# Altium PCB PCB1.PcbDoc
Units mm, origin at the board's own origin, x right, y up, seen from the top; angles counter-clockwise.
Board outline 75 x 30 mm, 3 copper layers (Top Layer, Mid-Layer 2, Bottom Layer); 24 components, 15 nets, 80 pads, 8 vias.
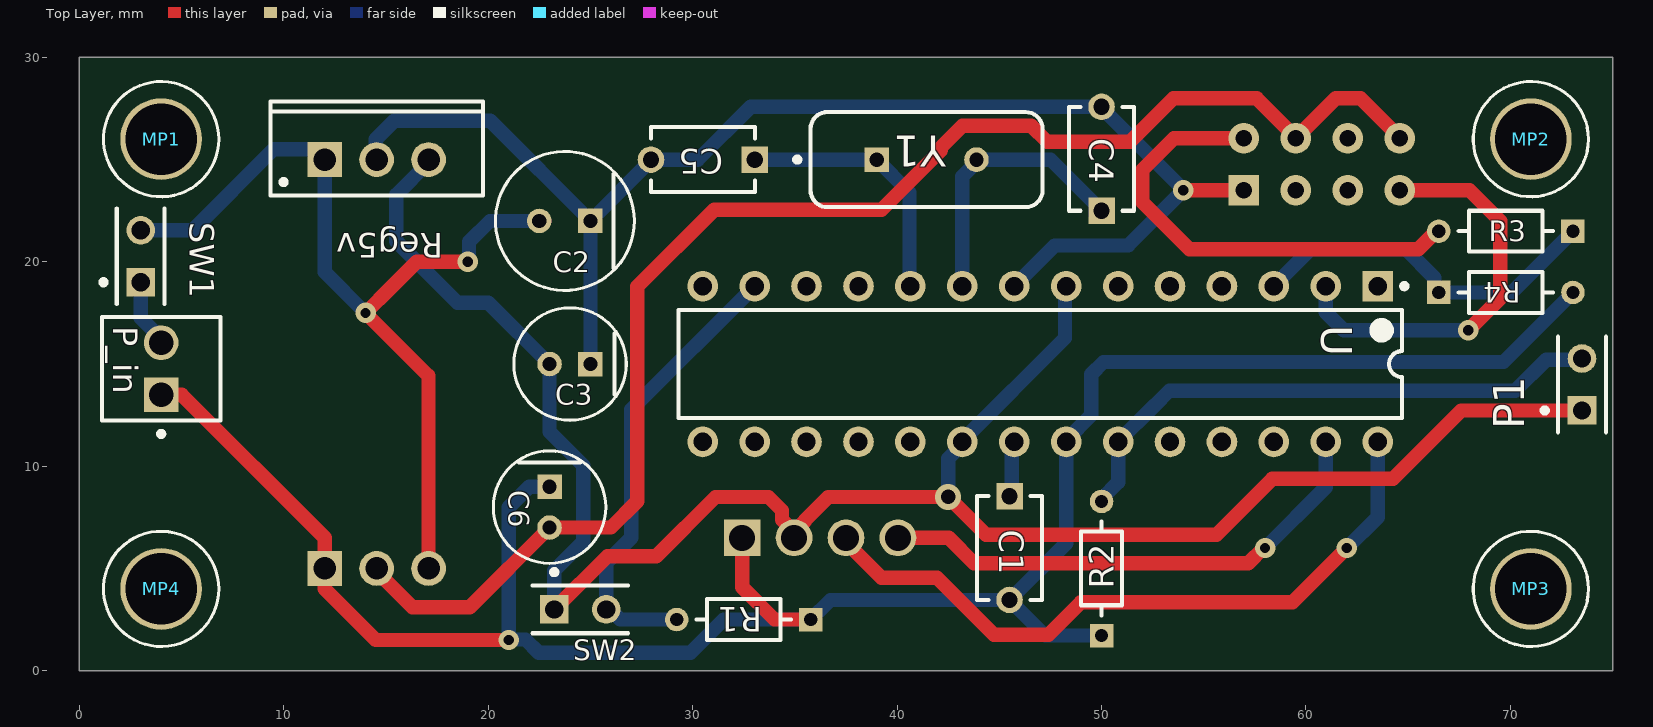
[diagram p0: Top Layer view]
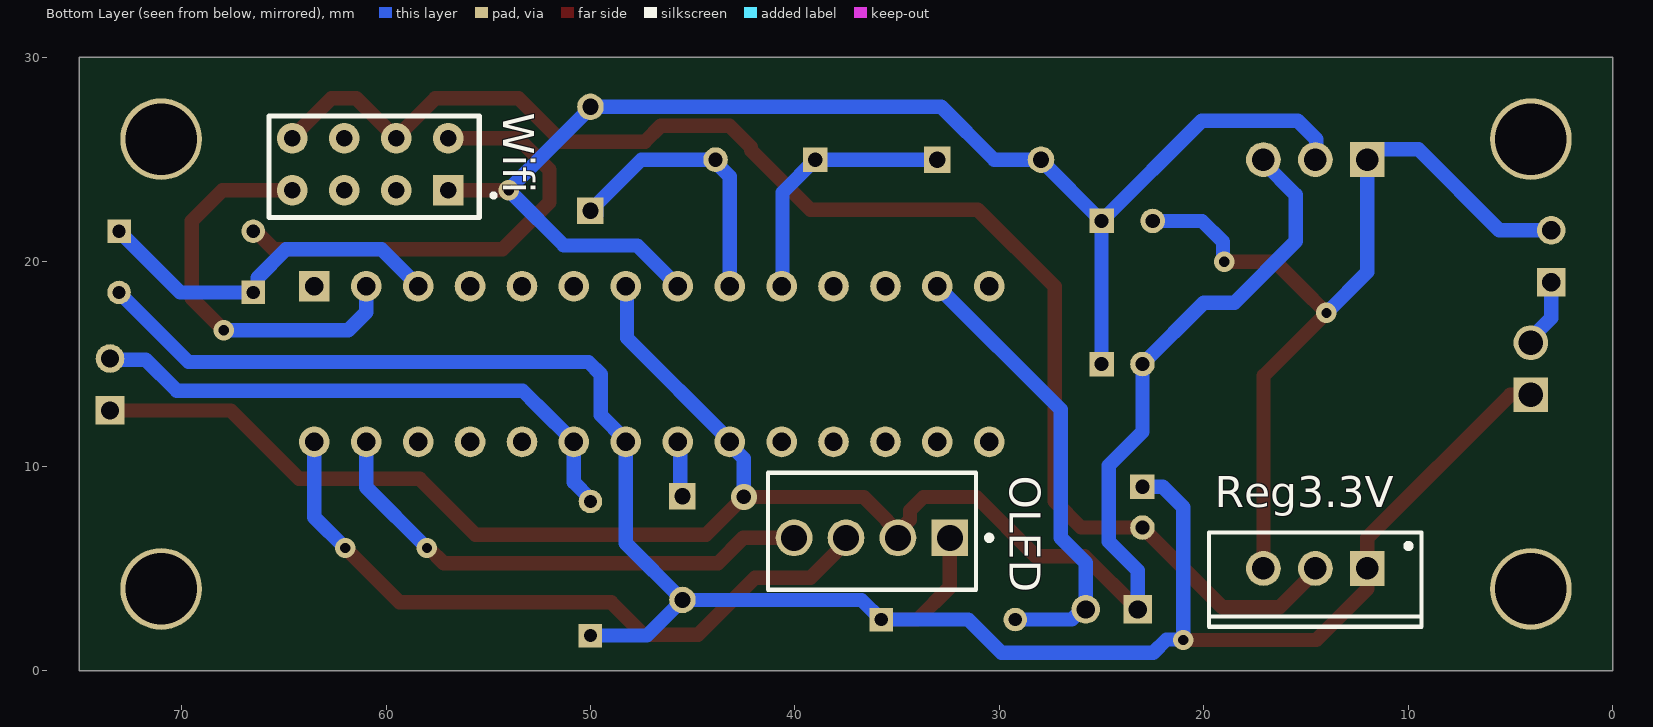
[diagram p1: Bottom Layer view, seen from below]
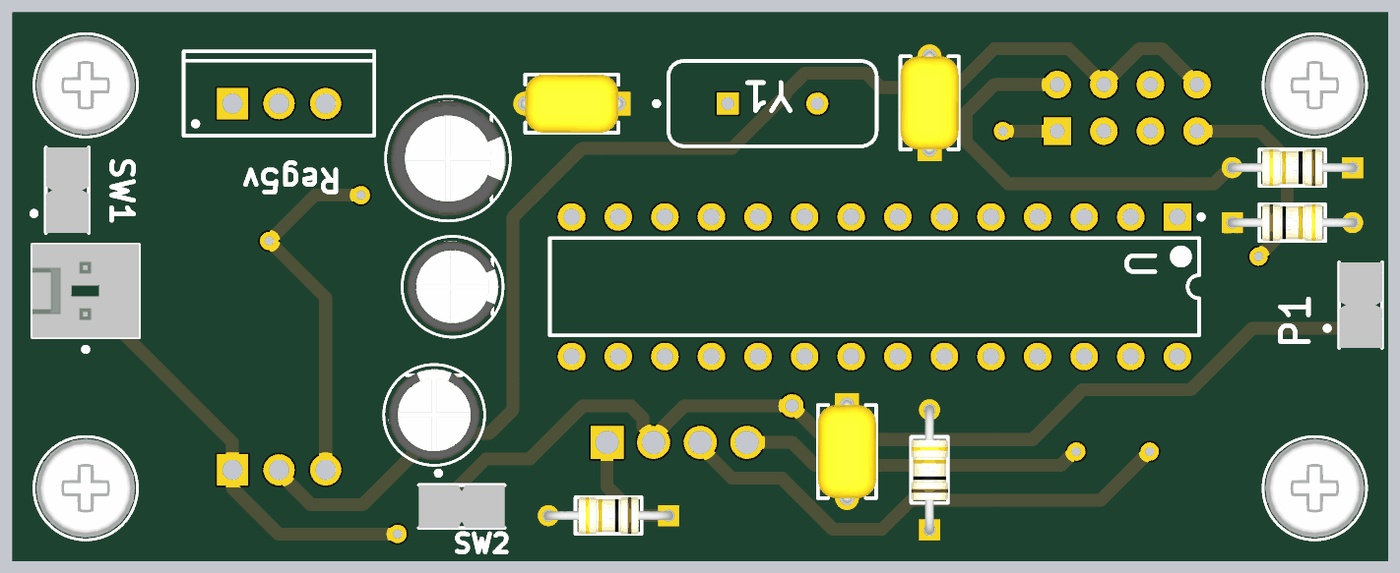
[diagram p2: 3D render of the assembled board from above, using the file's embedded part models]

## Layer stack, top to bottom
Top Solder: solder mask 0.0102, Solder Resist, Dk 3.5
Top Layer: signal copper 0.0356
Dielectric 1: dielectric 0.32, FR-4, Dk 4.8
Mid-Layer 2: signal copper 0.0356
Dielectric2: dielectric 0.32, FR-4, Dk 4.8
Bottom Layer: signal copper 0.0356
Bottom Solder: solder mask 0.0102, Solder Resist, Dk 3.5

## Board outline
75,30 75,0 0,0 0,30

## Design rules (kind name [scope] priority, off if disabled: settings)
BoardOutlineClearance [All] p1: gap=0.2 ignorepadtopadclearanceinfootprint=FALSE except(0.4: Arc-SplitBarrior Arc-SplitContinuation Track-SplitBarrior Track-SplitContinuation SMDPad-SplitBarrior SMDPad-SplitContinuation THPad-SplitBarrior THPad-SplitContinuation Via-SplitBarrior Via-SplitContinuation Fill-SplitBarrior Fill-SplitContinuation Poly-SplitBarrior Poly-SplitContinuation Region-SplitBarrior Region-SplitContinuation Text-SplitBarrior Text-SplitContinuation)
Clearance [All] p1: gap=0.7 ignorepadtopadclearanceinfootprint=FALSE
HoleSize [All] p1: absolutevalues=TRUE maxlimit=6.3 minlimit=0.2 maxpercent=80.000 minpercent=20.000
MinimumAnnularRing [All] p1: minimumring=0.076
MinimumSolderMaskSliver [All] p1: minsoldermaskwidth=0.1
PolygonConnect PolygonConnect_1 [All] p1: thpad.connectstyle=Relief thpad.reliefconductorwidth=0.508 thpad.reliefentries=4 thpad.polygonreliefangle="90 Angle" thpad.airgapwidth=0.254 smdpad.connectstyle=Relief smdpad.reliefconductorwidth=0.508 smdpad.reliefentries=4 smdpad.polygonreliefangle="90 Angle" smdpad.airgapwidth=0.254 via.connectstyle=Direct via.reliefconductorwidth=0.508 via.reliefentries=4 via.polygonreliefangle="90 Angle" via.airgapwidth=0.254
RoutingCorners [All] p1: cornerstyle=Round minsetback=2.54 maxsetback=2.54
RoutingVias [All] p1: holewidth=0.5 width=1 viastyle="Through Hole" minholewidth=0.2 minwidth=0.45 maxholewidth=1 maxwidth=2
SilkToSilkClearance [All] p1: silktosilkclearance=0.1
SilkToSolderMaskClearance [IsPad] p1: minsilkscreentomaskgap=0.1 clearancetoexposedcopper=TRUE
SolderMaskExpansion [All] p1: expansion=0.102 istentingtop=FALSE
Width [All] p1: maxlimit=2.54 minlimit=0.089 preferedwidth=0.7 toplayer_minwidth=0.6 midlayer2_prefwidth=0.381 bottomlayer_minwidth=0.6 minimp=50.000000 maximp=50.000000 favimp=50.000000
25 further rules are at their usual default settings.

## Components (designator, comment, footprint, x,y, rotation, side; value= is the part's Value field where it differs from the comment)
C1 "100nf" FP-C322C104K5R5TA-MFG 45.5,6 r270 top
C2 "4.7uF" FP-RAD-TH-D_6_3_0_5-L_11-MFG 23.75,22 r180 top
C3 "10uF" FP-RAD-TH-D_5_0_5-L_11_1-MFG 24,15 r180 top
C4 "22pF" FP-C322C104K5R5TA-MFG 50,25.04 r90 top
C5 "22pF" FP-C322C104K5R5TA-MFG 30.5,25 r180 top
C6 "10uF" FP-RAD-TH-D_5_0_5-L_11_1-MFG 23,8 r270 top
MP1 "9901" FP-9901-MFG 4,26 r0 top
MP2 "9901" FP-9901-MFG 71,26 r0 top
MP3 "9901" FP-9901-MFG 71,4 r0 top
MP4 "9901" FP-9901-MFG 4,4 r0 top
OLED "6" TECO-640456-4 36.23,6.5 r180 bottom
P1 "5-146280-2" TECO-5-146280-2_V 73.5,14 r90 top
P_in "9V" MOLX-22-27-2021_V 4,14.77 r90 top
R1 "10k" FP-CF18-MFG 32.5,2.5 r180 top value=10kΩ
R2 "10k" FP-CF18-MFG 50,5 r90 top value=10kΩ
R3 "1k" FP-CF18-MFG 69.78,21.5 r180 top value=10kΩ
R4 "2.2k" FP-CF18-MFG 69.78,18.5 r0 top value=10kΩ
Reg3.3V "LD1117V33" TO220 14.54,5 r0 bottom
Reg5v "5V" TO220 14.54,25 r0 top
SW1 "5-146280-2" TECO-5-146280-2_V 3,20.27 r90 top
SW2 "5-146280-2" TECO-5-146280-2_V 24.5,3 r0 top
U "ATmega328P-PU" 28P3 47,15 r270 top
Wifi "ESP8266-01/ESP-01" XCVR_ESP8266-01/ESP-01 60.77,15.19 r0 bottom
Y1 "16MHz" FOX-FOXSLF160-20 41.44,25 r0 top

## Footprints (in the part's own frame and the unit in brackets; to place one, negate y for a bottom-side part, rotate by r counter-clockwise, add the part's x,y. Pads: shape width x height; smd on the part's side, far side on the other; paste and mask are expansions set on the pad)
28P3 [mm] "28-Pin Plastic Dual In-Line Package (PDIP)"
  rect 1.5x1.5 hole 0.9: 1(-3.81,16.51)
  round 1.5 hole 0.9: 2(-3.81,13.97) 3(-3.81,11.43) 4(-3.81,8.89) 5(-3.81,6.35) 6(-3.81,3.81) 7(-3.81,1.27) 8(-3.81,-1.27) 9(-3.81,-3.81) 10(-3.81,-6.35) 11(-3.81,-8.89) 12(-3.81,-11.43) 13(-3.81,-13.97) 14(-3.81,-16.51) 15(3.81,-16.51) 16(3.81,-13.97) 17(3.81,-11.43) 18(3.81,-8.89) 19(3.81,-6.35) 20(3.81,-3.81) 21(3.81,-1.27) 22(3.81,1.27) 23(3.81,3.81) 24(3.81,6.35) 25(3.81,8.89) 26(3.81,11.43) 27(3.81,13.97) 28(3.81,16.51)
  silkscreen extent -3.93,-17.7 2.65,17.94, body extent -3.6,-17.65 3.6,17.65, height 4.58
FOX-FOXSLF160-20 [mm] "THD, 2-Leads, Body 11.35x4.65mm"
  rect 1.2x1.2 hole 0.7: 1(-2.44,0)
  round 1.2 hole 0.7: 2(2.44,0)
  silkscreen extent -6.45,-2.33 5.68,2.32, body extent -5.67,-2.32 5.68,2.33, height 3.6
FP-9901-MFG [mm]
  round 4 hole 3.5 unplated paste-1000 mask+0: ""(0,0)
  silkscreen extent -2.82,-2.82 2.82,2.82, body extent -2.92,-2.92 2.92,2.92, height 0.25
FP-C322C104K5R5TA-MFG [mm]
  rect 1.3x1.3 hole 0.8 paste-1000 mask+0: 1(-2.54,0)
  round 1.3 hole 0.8 paste-1000 mask+0: 2(2.54,0)
  silkscreen extent -2.54,-1.59 2.54,1.59, body extent -3.29,-1.69 3.29,1.69, height 0.25
FP-CF18-MFG [mm]
  rect 1.15x1.15 hole 0.65 paste-1000 mask+0: 1(-3.28,0)
  round 1.15 hole 0.65 paste-1000 mask+0: 2(3.28,0)
  silkscreen extent -2.31,-1 2.3,1, body extent -3.96,-1.1 3.96,1.1, height 0.25
FP-RAD-TH-D_5_0_5-L_11_1-MFG [mm]
  rect 1.2x1.2 hole 0.7 paste-1000 mask+0: 1(-1,0)
  round 1.2 hole 0.7 paste-1000 mask+0: 2(1,0)
  silkscreen extent -2.75,-2.75 2.75,2.75, body extent -2.85,-2.85 2.85,2.85, height 0.25
FP-RAD-TH-D_6_3_0_5-L_11-MFG [mm]
  rect 1.2x1.2 hole 0.7 paste-1000 mask+0: 1(-1.25,0)
  round 1.2 hole 0.7 paste-1000 mask+0: 2(1.25,0)
  silkscreen extent -3.4,-3.4 3.4,3.4, body extent -3.5,-3.5 3.5,3.5, height 0.25
MOLX-22-27-2021_V [mm] "Header, 2-Leads, Body 5.8x5.08mm"
  rect 1.7x1.7 hole 1.19: 1(-1.27,0)
  round 1.7 hole 1.19: 2(1.27,0)
  silkscreen extent -3.31,-2.9 2.54,2.9, body extent -2.54,-2.9 2.54,2.9, height 11.72
TECO-5-146280-2_V [mm] "Connector, 2-Leads, Body 4.67x2.34mm, Pitch 2.54mm"
  rect 1.4x1.4 hole 0.89: 1(-1.27,0)
  round 1.4 hole 0.89: 2(1.27,0)
  silkscreen extent -2.33,-1.17 2.33,1.94, body extent -2.34,-1.17 2.34,1.17, height 5.33
TECO-640456-4 [mm]
  rect 1.8x1.8 hole 1.27 paste+0: 1(3.81,0)
  round 1.8 hole 1.27 paste+0: 2(1.27,0) 3(-1.27,0) 4(-3.81,0)
  silkscreen extent -5.08,-2.54 5.86,3.18
TO220 [mm] "TO, Thru-Hole, Vertical, Heatsink Mounted; 3 In-Line Leads; Pitch 2.54 mm"
  rect 1.7x1.7 hole 1.1: 1(-2.54,0)
  round 1.7 hole 1.1: 2(0,0) 3(2.54,0)
  silkscreen extent -5.2,-1.75 5.2,2.85, body extent -5.25,-1.8 5.25,2.9, height 19.7
XCVR_ESP8266-01/ESP-01 [mm]
  rect 1.5x1.5 hole 0.8: 1(-3.81,-8.31)
  round 1.5 hole 0.8: 2(-1.27,-8.31) 3(1.27,-8.31) 4(3.81,-8.31) 5(-3.81,-10.85) 6(-1.27,-10.85) 7(1.27,-10.85) 8(3.81,-10.85)
  silkscreen extent -6.13,-11.94 4.95,-6.98

## Part data
C1 C4 C5: library part CMP-03020-034661-1, "CAP CER 0.1UF 50V X7R RADIAL", Capacitance=100nF, Case/Package=Radial, Dielectric=X7R, Dielectric Material=Ceramic, Max Operating Temperature=125°C, Min Operating Temperature=-55°C, Package Quantity=500, Tolerance=10%, Voltage=50V, Construction=RADIAL, Depth=3.18mm, Dissipation Factor=2.5%, Height=3.18mm, Height - Seated (Max)=0.26inch, Lead Diameter=0.51mm, Lead Free="Lead Free", Lead Length=7mm, Lead Pitch=5.08mm, Lead/Base Style="Formed Leads", Length=5.08mm, Material=Ceramic, Mount="Through Hole", Number of Pins=2, Packaging=Bulk, Radiation Hardening=No, REACH SVHC="No SVHC", RoHS Compliant=Yes, Series="Golden Max™", Termination=Radial, Voltage Rating=50V, Voltage Rating (DC)=50V, Weight=0.0625lb, Width=0.125inch
C2: library part CMP-05427-000237-1, "Aluminum Electrolytic Capacitors (Radial Lead Type) 4.7uF ±20% 160V", Case/Package=Radial, Dielectric Material=Aluminium, Max Operating Temperature=105°C, Min Operating Temperature=-25°C, Package Quantity=200, Ripple Current=43mA, Tolerance=20%, Voltage=160V, Capacitance=4.7uF, Construction=RADIAL, Diameter=6.3mm, Dissipation Factor=0.15%, Height=11.2mm, Height - Seated (Max)=0.48inch, Lead Diameter=0.5mm, Lead Free="Lead Free", Lead Pitch=2.5mm, Lead/Base Style=Straight, Length=11.2mm, Life (Hours)=2000Hour, Mount="Through Hole", Number of Pins=2, Packaging=Bulk, Radiation Hardening=No, REACH SVHC="No SVHC", Ripple Current (AC)=43mA, RoHS Compliant=Yes, Series=NHG, Termination=Radial, Voltage Rating=160V, Voltage Rating (DC)=160V, Weight=0.01lb, Width=0.25inch
C3 C6: library part CMP-05427-000869-1, "Aluminum Electrolytic Capacitors (Radial Lead Type) 10uF ±20% 100V", Case/Package=Radial, Dielectric Material=Aluminium, Leakage Current=3uA, Max Operating Temperature=85°C, Min Operating Temperature=-40°C, Package Quantity=200, Ripple Current=70mA, Tolerance=20%, Voltage=100V, Capacitance=10uF, Construction=RADIAL, Contact Plating=Tin, Diameter=5mm, Dissipation Factor=0.1%, Height=11mm, Height - Seated (Max)=0.472inch, Lead Diameter=0.5mm, Lead Free="Lead Free", Lead Pitch=2mm, Lead/Base Style=Straight, Length=11mm, Life (Hours)=2000Hour, Mount="Through Hole", Number of Pins=2, Packaging=Bulk, Polarity=Polar, Radiation Hardening=No, REACH SVHC="No SVHC", Ripple Current (AC)=70mA, RoHS Compliant=Yes, Series=M, Termination=Radial, Voltage Rating=100V, Voltage Rating (DC)=100V, Width=5mm
MP1 MP2 MP3 MP4: library part CMP-19664-000002-1, "MACHINE SCREW PAN PHILLIPS 4-40", Package Quantity=100, Head Height=0.065inch, Lead Free="Lead Free", Length=0.44inch, Material="Stainless Steel", Mount=Screw, Outside Diameter=0.212inch, Series=-, Thread Size=#4-40
OLED: library part CMP-2000-05419-1, "Male Header, Pitch 2.54 mm, 1 x 4 Position, Height 10.03 mm, Tail Length 3.56 mm, RoHS, Bulk", Color=White, Current, Rating="5 /  / A", Flammability Rating=UL94V-0, Manufacturer="TE Connectivity", Manufacturer Part Number=640456-4, Temperature, Operating="-55to+105 /  / degC", Voltage, Rating="250 /  / V", Agency Approvals=CSA,UL, Angle=Straight, Brand/Series=MTA-100Series, Color, Housing=White, Connector Type=MTA-100, Contact Centerline Spacing="0.100 /  / in.", Contact Mating Area Plating=Tin, Contact Plating=Tin, Contact Shape=Square, Contact Termination Area Plating=Tin, Datasheet URL=https://datasheet.ciiva.com/16286/eng-ds-82056-mta-0608-16286228.pdf, Datasheet Version=Dec-14, Length, Overall="0.4 /  / \"", Length, Pin="0.14 /  / \"", Length, Terminal Post="0.14 /  / in.", Manufacturer URL=http://www.te.com/, Material, Contact=CopperAlloy, Material, Housing=Polyester, Mount Angle=Vertical, Mounting Hole Size="0.04 /  / \"", Mounting Type=PCMount, Number of Contacts=4, Number of Positions=4, Number of Rows=1, Pin Spacing="0.1 /  / \"", Primary Type=InterconnectSystem, Size, Post="0.025 /  / in.", Special Features=Pinstrip, Standards=RoHSCompliant,ELVCompliant,UL94V-0, Termination=Solder, Type=PCBPlug
P1 SW1 SW2: library part CMP-2000-07492-1, "Male Header, Pitch 2.54 mm, 1 x 2 Position, Height 8.21 mm, Tail Length 3.05 mm, -65 to 105 degC, RoHS, Bulk", Case\/Package=100, Colour=Black, Current Rating=3A, Flammability Rating=UL94V-0, High Temperature Housing=Yes, Manufacturer="TE Connectivity", Max Current Rating=5A, Max Operating Temperature=105degC, Min Operating Temperature=-65degC, Package Description="Male Header, Pitch 2.54 mm, 1 x 2 Position, Height 8.21 mm, Tail Length 3.05 mm", Package Quantity=500, Approvals=CSA, Board Standoff=No(Without), Connector Type=Header, Contact Gender=Male, Contact Material=CopperAlloy, Contact Mating Length=0.23inch, Contact Plating=Matte, Contact Protection=No(Without), Contact Shape=Square, Datasheet URL=http://www.te.com/commerce/DocumentDelivery/DDEController?Action=showdoc&DocId=Customer+Drawing%7F146280%7FH1%7Fpdf%7FEnglish%7FENG_CD_146280_H1.pdf%7F5-146280-2, Datasheet Version="Rev. H1, 08/2016", Depth=2.34mm, Gasket=No(Without), High Speed Serial Data Connector=No, Housing Colour=Black, Housing material=Polymer, Keyed=No, Length=4.67mm, Manufacturer URL=http://www.te.com/, Mating Alignment=No(Without), Mating Connector Lock=No(Without), Mating Post Length=0.23inch, Mount=ThroughHole, Mounting Technology=ThroughHole, Number of Contacts=2, Number of Positions=2, Number of Rows=1, Orientation=Straight, Package Reference=5-146280-2, Packaging=Carton, Panel Mount Retention=No(Without), PCB Mount Retention=Without, PCB Mounting Orientation=Vertical, PCB Thickness=0.063inch, Pitch=2.54mm, Radiation Hardening=No, RoHSCompliant=true, Row Spacing=2.54mm, Selectively Loaded=No(Without), Stabilizers=No(Without), Termination=ThroughHole, Termination Post Length=0.12inch
P_in: library part CMP-2000-05537-1, "Male Header, Pitch 2.54 mm, 1 x 2 Position, Height 11.7 mm, Tail Length 3.56 mm, 0 to 75 degC, RoHS, Bulk", Current - Max=4A, Manufacturer=Molex, Operating Temperature=0°Cto+75°C, Package Description="2-Leads Header, Body 5.08 x 5.8 mm, Pitch 2.54 mm", Package Reference=22-27-2021, Package Version="Rev. BC, 02/2012", PartNumber=0022272021, Voltage - Max=250V, Contact Material=Tinplatedbrass, Current Rating=4A, Datasheet URL=http://www.molex.com/pdm_docs/sd/022272021_sd.pdf, Datasheet Version="Rev. F, 06/2009", Housing material=Nylon(UL94V-0), Manufacturer URL=http://www.molex.com/, Mounting Technology=ThroughHole, No. of Positions=2, No. of Rows=1, Orientation=Vertical, Pitch=2.54mm, Voltage Rating=250V
R1 R2 R3 R4: library part CMP-26528-000002-1, "RES 10K OHM 1/8W 5% CF AXIAL", Manufacturer="Stackpole Electronics", Manufacturer Part Number=CF18JT10K0, Package=CF18, Power Rating=0.125W, Resistance=10kΩ, Temperature="-55°C to +155°C", Temperature Coefficient=0-500ppm/°C, Temperature Range High=+155°C, Temperature Range Low=-55°C, Tolerance=5%, Voltage Rating=250V, Automotive=No, Category=Res, ComponentLink2Description=Datasheet, ComponentLink2URL=http://www.seielect.com/Catalog/SEI-CF_CFM.pdf, Composition="Carbon Film", Device Class L1="Passive Components", Device Class L2=Resistors, Device Class L3="Through-Hole Resistors", Digikey Description="RES 10K OHM 1/8W 5% CF AXIAL", Height=2mm, Ipc Land Pattern Name=RESAD656W65L360D200, Lead Free=Yes, Octopart=https://octopart.com/cf18jt10k0-stackpole+electronics-19205642, RoHS=TRUE, Series=CF
Reg3.3V: library part CMP-0244-00470-1, "Fixed Low Drop Positive Voltage Regulator, 3.3V, 3-Pin TO-220", ComponentLink1Description="Manufacturer URL", ComponentLink1URL=http://www.st.com, ComponentLink2Description=Datasheet, ComponentLink2URL=http://www.st.com/internet/com/TECHNICAL_RESOURCES/TECHNICAL_LITERATURE/DATASHEET/CD00000544.pdf, ComponentLink3Description="Package Specification", ComponentLink3URL=http://www.st.com/internet/com/TECHNICAL_RESOURCES/TECHNICAL_LITERATURE/PACKAGE_INFORMATION/CD00004649.pdf, DatasheetVersion=1/11/2011, PackageDescription="TO, Thru-Hole, Vertical, Heatsink Mounted; 3 In-Line Leads; Pitch 2.54 mm", PackageReference=TO220, PackageVersion=ver3.0
Reg5v: library part CMP-0244-00495-1, "Positive Voltage Regulator, 6V, 3-Pin TO-220", ComponentLink1Description="Manufacturer URL", ComponentLink1URL=http://www.st.com, ComponentLink2Description=Datasheet, ComponentLink2URL=http://www.st.com/internet/com/TECHNICAL_RESOURCES/TECHNICAL_LITERATURE/DATASHEET/CD00000444.pdf, ComponentLink3Description="Package Specification", ComponentLink3URL=http://www.st.com/internet/com/TECHNICAL_RESOURCES/TECHNICAL_LITERATURE/PACKAGE_INFORMATION/CD00004649.pdf, DatasheetVersion=16/11/2011, PackageDescription="TO, Thru-Hole, Vertical, Heatsink Mounted; 3 In-Line Leads; Pitch 2.54 mm", PackageReference=TO220, PackageVersion=ver3.0
U: library part CMP-0095-00013-2, "8-bit AVR Microcontroller, 32KB Flash, 1KB EEPROM, 2KB SRAM, 28-pin PDIP, Industrial Grade (-40°C to 85°C)", ComponentLink1Description="Manufacturer URL", ComponentLink1URL=http://www.atmel.com/, ComponentLink2Description="ATmega48A/48PA/88A/88PA/168A/168PA/328/328P Datasheet", ComponentLink2URL=http://www.atmel.com/dyn/resources/prod_documents/8271.pdf, ComponentLink3Description="ATmega48A/48PA/88A/88PA/168A/168PA/328/328P Summary", ComponentLink3URL=http://www.atmel.com/dyn/resources/prod_documents/8271S.pdf, DatasheetVersion="revD, May-2011", PackageDescription="28-lead (0.300\"/7.62mm Wide) Plastic Dual Inline Package (PDIP)", PackageReference=28P3, PackageVersion="revB, Sep-2001", RevisionNote="DatasheetVersion updated. URLs added."
Wifi: "MakerFocus 4pcs ESP8266 ESP-01 Serial Wireless WiFi Transceiver Receiver Module 1MB SPI Flash DC3.0-3.6V Internet of Things WiFi Module Board Compatible with Ar duino", Package=None, Availability=Unavailable, MP=ESP8266-01/ESP-01, Price=None
Y1: library part CMP-1749-00003-1, "Resistance Weld Thru-Hole Crystal, 16 MHz, -20 to 70 degC, 2-Pin THD, RoHS, Bulk", Case\Package=Axial, Max Operating Temperature="155 degC", Min Operating Temperature="-55 degC", Package Quantity=200, Power Rating="250 mW", Resistance="221 kohm", Tolerance=1%, Voltage Rating="250 V", ComponentLink1Description="Manufacturer URL", ComponentLink1URL=http://www.foxonline.com/, ComponentLink2Description=Datasheet, ComponentLink2URL=http://www.foxonline.com/pdfs/hc49slf.pdf, DatasheetVersion=Mar-15, Length="0.248 inch", Mount="Through Hole", PackageDescription="2-Pin Through Hole Device, Body 11.35 x 4.65 mm", PackageReference=FOXSLF160-20, Packaging=Bulk, RoHSCompliant=true

## Via types
v1: diameter 1, hole 0.5, Top Layer to Bottom Layer, 7 vias
v2: diameter 1.27, hole 0.711, Top Layer to Bottom Layer, 1 vias

## Nets (pads, with @x,y where several pads share a name; then routed paths per layer and width w, separated by ;. In a path a pad name is that pad's centre, name@x,y a point inside that pad or via, vN(x,y) a via of type N, cw(c..) or ccw(c..) an arc to the next point about the centre after c; other vN are vias at no path point)
3.3V: C6.2 Reg3.3V.2 Wifi.6 Wifi.8 | length 70.9
  Top Layer w0.7: Reg3.3V.2 14.54,4.853 16.293,3.1 19.1,3.1 C6.2 26,7 27.29,8.29 27.29,18.79 31.05,22.55 39.235,22.55 42.145,25.46 42.145,25.598 43.197,26.65 46.565,26.65 47.335,25.88 51.4,25.88 53.52,28 57.586,28 59.5,26.086 Wifi.6@59.5,26.046 ; Wifi.6 Wifi.6@59.5,26.046 ; Wifi.8@64.81,25.856 62.666,28 61.454,28 Wifi.6@59.5,26.046
5V: C3.2 OLED.2 P1.1 Reg5v.3 SW2.1 U.7 U.20 | length 98.6
  Top Layer w0.7: SW2.1 25.83,5.6 28.215,5.6 31.115,8.5 33.705,8.5 34.37,7.835 34.37,7.388 OLED.2@34.96,6.798 ; P1.1 67.596,12.73 64.256,9.39 58.358,9.39 55.623,6.655 44.345,6.655 v2(42.5,8.5) 36.636,8.5 35.477,7.341 35.477,7.314 OLED.2@34.96,6.798 ; OLED.2@34.96,6.798 OLED.2 OLED.2@34.96,6.798
  Bottom Layer w0.7: Reg5v.3 17.08,24.853 15.5,23.273 15.5,21 18.5,18 20,18 C3.2 23,11.685 24.65,10.035 24.65,6.317 23.23,4.897 SW2.1 ; v2(42.5,8.5) 42.5,10.38 43.19,11.07 U.20 ; U.20@43.19,11.253 48.213,16.276 U.7@48.213,18.81
A0: P1.2 R2.2 U.23 | length 27.6
  Bottom Layer w0.7: R2.2 50,8.402 50.81,9.212 50.81,11.196 52.604,12.99 52.61,12.99 53.32,13.7 70.24,13.7 71.75,15.21 73.44,15.21 P1.2
A4: OLED.4 U.27 | length 25.2
  Top Layer w0.7: OLED.4 42.52,6.5 43.765,5.255 57.174,5.255 57.919,6 v1(58,6)
  Bottom Layer w0.7: v1(58,6) 60.97,8.97 U.27
A5: OLED.3 U.28 | length 34.1
  Top Layer w0.7: OLED.3@37.391,6.391 39.232,4.55 40.848,4.55 41.95,4.55 44.74,1.76 47.405,1.76 48.99,3.345 59.345,3.345 v1(62,6) ; U.28@63.51,11.184 U.28
  Bottom Layer w0.7: v1(62,6) 63.51,7.51 U.28
GND: C1.2 C2.1 C3.1 C4.2 C5.2 C6.1 OLED.1 P_in.1 R1.1 R2.1 R4.2 Reg3.3V.1 Reg5v.2 U.8 U.22 Wifi.1 | length 174.7
  Top Layer w0.7: P_in.1 5,13.5 12,6.5 Reg3.3V.1 12,4 14.5,1.5 v1(21,1.5) ; OLED.1 32.42,4.08 34,2.5 R1.1 ; v1(54,23.5) Wifi.1
  Bottom Layer w0.7: Reg5v.2 14.5,25.04 14.5,26 15.4,26.9 20.1,26.9 C2.1 ; C6.1 22,9 21,8 v1(21,1.5) 21.027,1.527 21.819,1.527 22.47,0.875 29.893,0.875 31.518,2.5 R1.1 36.74,3.46 C1.2 ; C3.1 C2.1 ; C5.2 C5.2@28,25 ; U.8 45.73,18.816 47.714,20.8 51.3,20.8 v1@53.75,23.25 ; R2.1 47.24,1.72 C1.2 ; v1(54,23.5) 54,23.54 50,27.54 C4.2 32.835,27.58 30.255,25 C5.2@28,25 ; Wifi.1 Wifi.1@57,23.46 ; R4.2 69.66,15.1 50.1,15.1 49.5,14.5 49.5,12.506 48.27,11.276 U.22 48.27,6.23 C1.2 ; C2.1 C5.2@28,25
NetC1_1: C1.1 U.21 | length 2.7
  Bottom Layer w0.7: C1.1 45.615,8.655 45.615,11.075 U.21
NetC4_1: C4.1 U.9 Y1.2 | length 13.8
  Bottom Layer w0.7: U.9 43.19,24.175 43.88,24.865 Y1.2 47.5,25 49.7,22.8 49.7,22.26 C4.1@49.73,22.23
NetC5_1: C5.1 U.10 Y1.1 | length 12.8
  Bottom Layer w0.7: C5.1 34.54,25 Y1.1 40.605,23.395 40.605,18.855 U.10
NetP_in_2: P_in.2 SW1.1 | length 3.4
  Bottom Layer w0.7: SW1.1 3,17.25 4,16.25 P_in.2
NetR1_2: R1.2 SW2.2 U.13 | length 22.5
  Bottom Layer w0.7: R1.2 26.459,2.5 25.959,3 SW2.2 25.77,5.278 27,6.508 27,12.774 33.03,18.804 U.13
NetR3_2: R3.2 Wifi.5 | length 23
  Top Layer w0.7: Wifi.5 53.54,26.04 52,24.5 52,22.91 54.3,20.61 62.325,20.61 65.488,20.61 66.378,21.5 R3.2
Recieve: R3.1 R4.1 U.3 | length 17.8
  Bottom Layer w0.7: U.3 58.43,18.816 60.114,20.5 60.224,20.61 64.89,20.61 66.275,19.225 66.275,18.725 R4.1 70.06,18.5 R3.1
Send: U.2 Wifi.4 | length 20.2
  Top Layer w0.7: Wifi.4 68,23.5 69.5,22 69.5,18.212 v1(67.938,16.65)
  Bottom Layer w0.7: U.2 60.97,17.53 61.85,16.65 v1(67.938,16.65)
Vin: C2.2 Reg3.3V.3 Reg5v.1 SW1.2 | length 44.1
  Top Layer w0.7: Reg3.3V.3 17.08,14.42 v1(14,17.5) 15.25,18.75 16.5,20 v1(19,20) ; C2.2 C2.2@22.75,22
  Bottom Layer w0.7: SW1.2 5.54,21.54 9.5,25.5 11.5,25.5 Reg5v.1 12,19.5 v1(14,17.5) ; v1(19,20) 19.057,20.057 19.057,20.976 20.081,22 C2.2
pads on no net: MP1. MP2. MP3. MP4. U.1 U.4 U.5 U.6 U.11 U.12 U.14 U.15 U.16 U.17 U.18 U.19 U.24 U.25 U.26 Wifi.2 Wifi.3 Wifi.7